# EAGLE board LowLevelv3 (EAGLE 9.2.2)
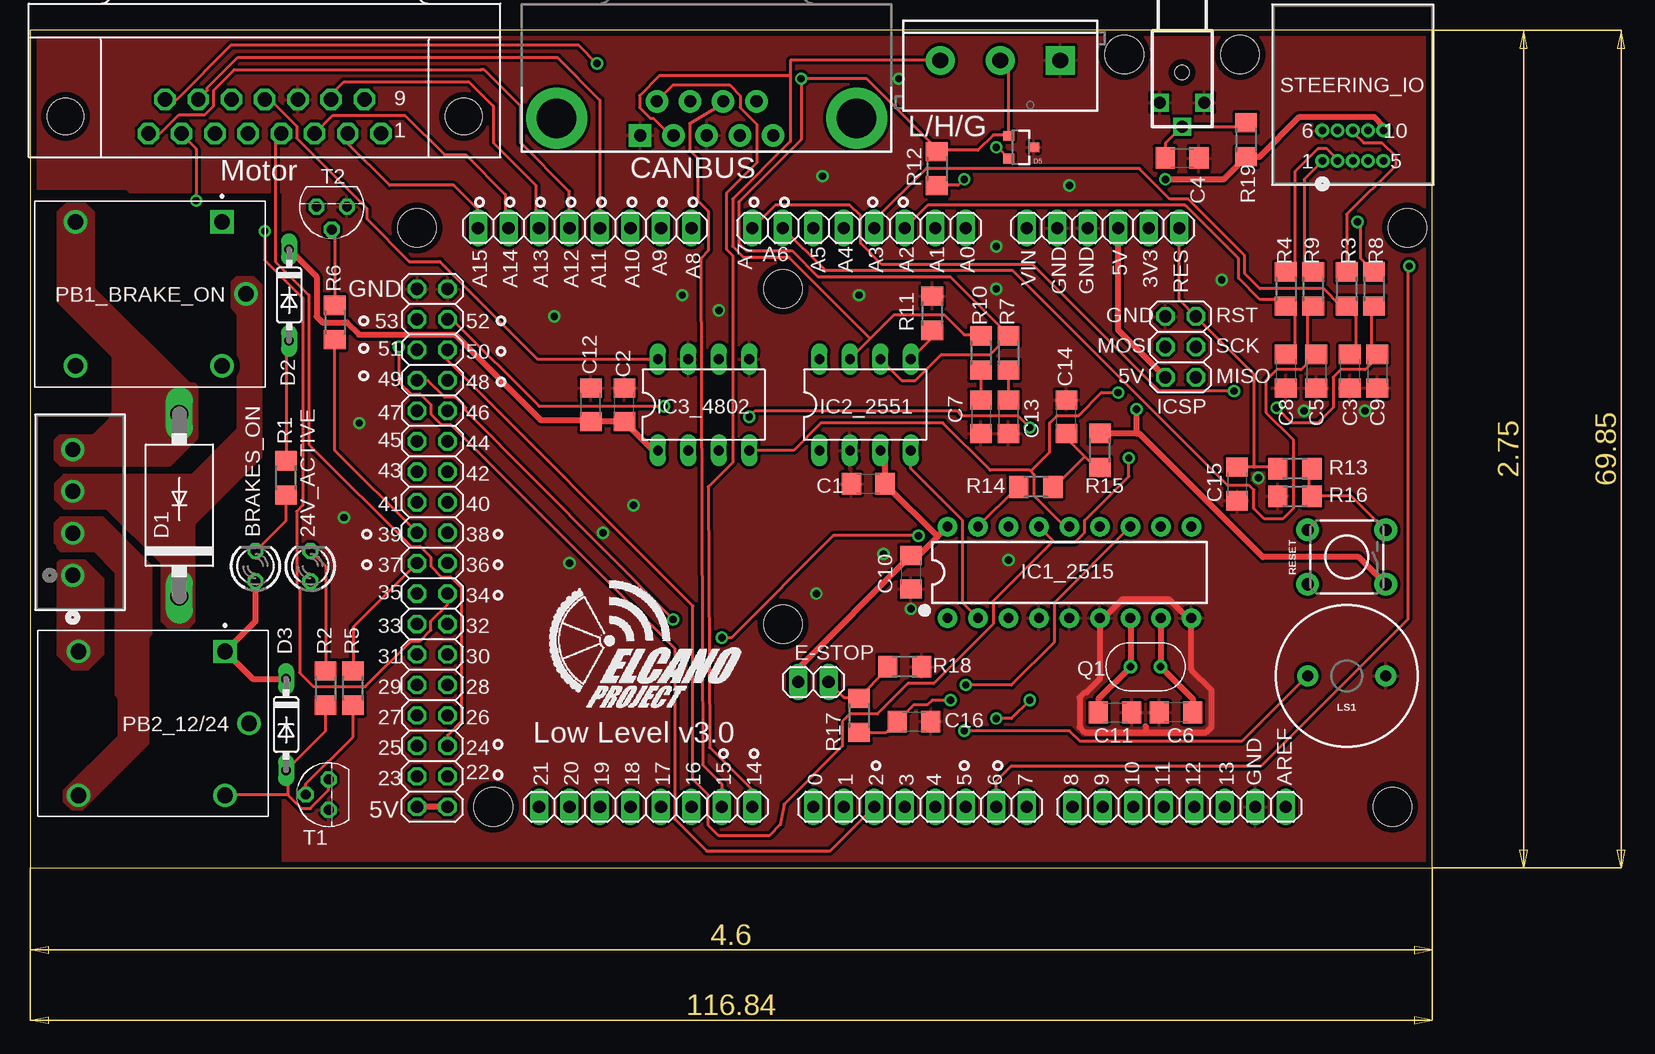
[diagram p0: board, top side]
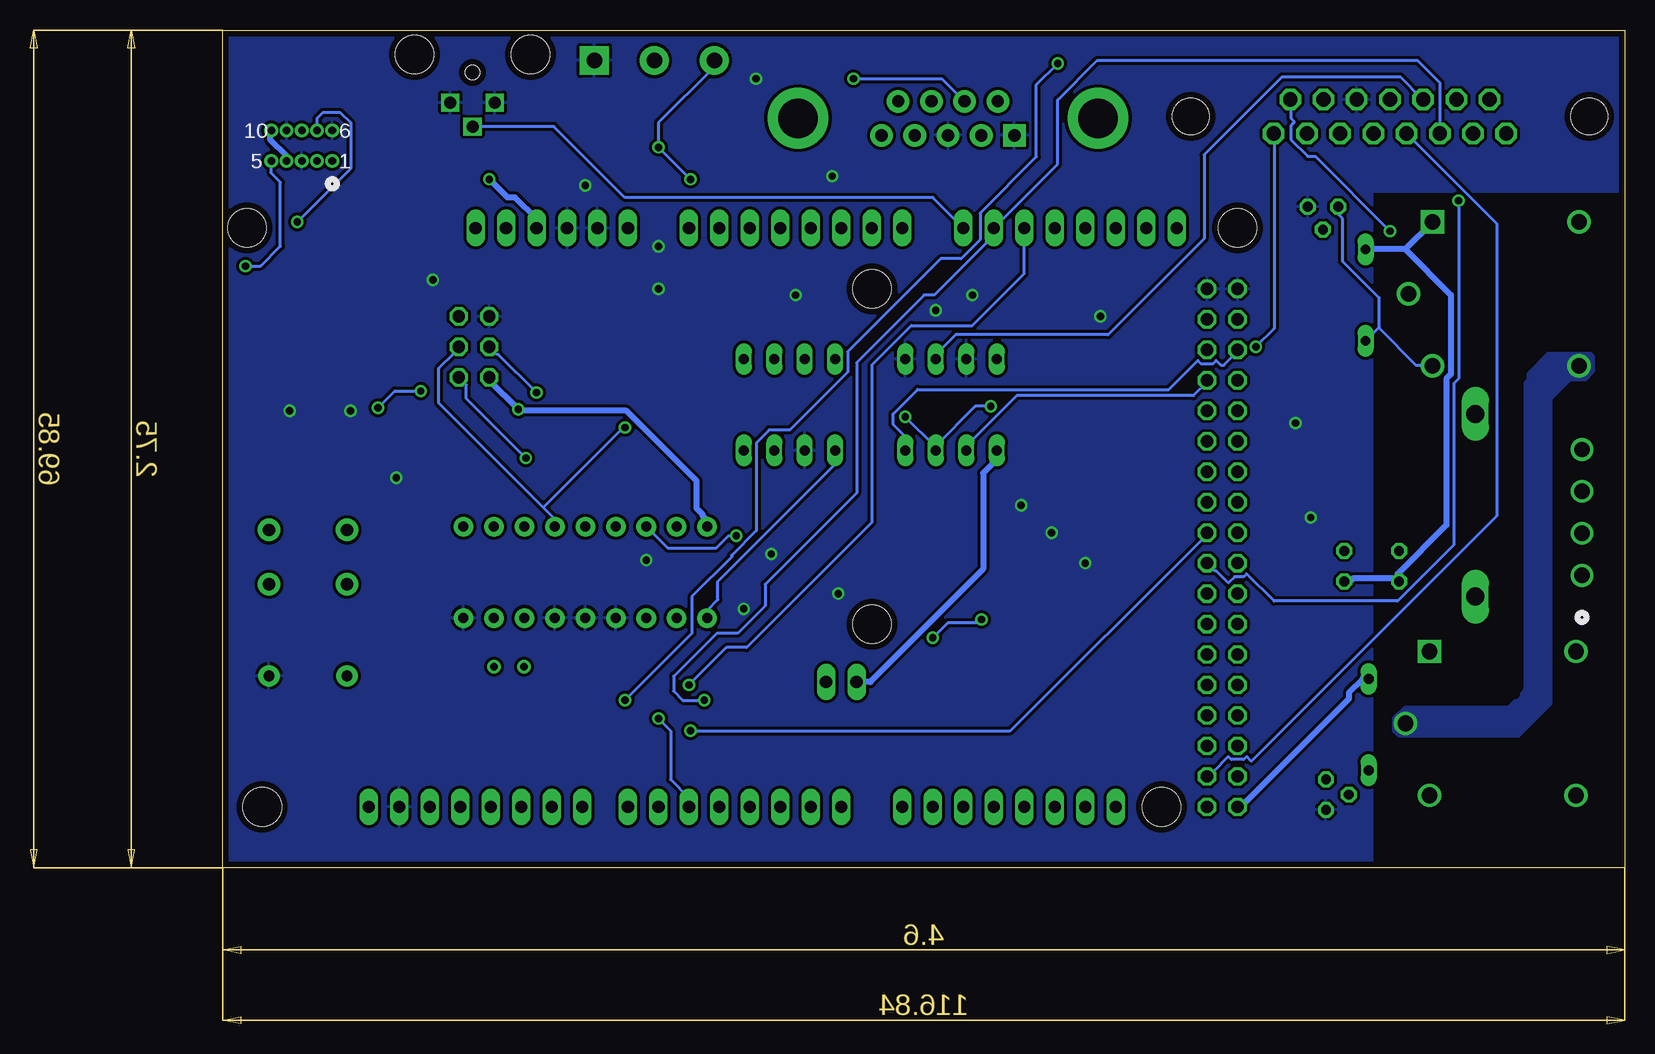
[diagram p1: board, bottom side, seen from below]

Size 116.84 x 69.85 mm. Coordinates in mm from the lower left corner, seen from the top.
Outline: 0,0 116.84,0 116.84,69.85 0,69.85 0,0
Copper layers (1*16): Top 0.035mm / dielectric 1.5mm / Bottom 0.035mm
Design rules "default *": minimum track width 10mil, minimum drill 24mil, track to track 8mil, track to pad 8mil, pad to pad 8mil, via to via 8mil, smd to smd 8mil, copper to edge 20mil, drill to drill 8mil, minimum pad ring 10mil, minimum via ring 8mil, stop-mask expansion 4mil, vias tented up to drill 0mil, thermal gap 10mil
Net classes: 0 default: width 0.254 mm, drill 0.305 mm, clearance 0.254 mm; 1 Power: width 0.508 mm, drill 0.305 mm, clearance 0.254 mm; 2 High Current: width 0.508 mm, drill 0.305 mm, clearance 0.508 mm; 3 SPI_Signals: width 0.254 mm, clearance 0.254 mm; 4 Oscillator: width 0.254 mm, clearance 0.508 mm
Holes 3.2 mm at 38.61,5.08 113.54,5.08 32.26,53.34 114.81,53.34 91.19,67.82 100.84,67.82 62.74,48.26 62.74,20.32
tRestrict: area 0,3.8 to 20.3,56.1
bRestrict: area 0,9.9 to 20.3,44.7

## Footprints (pad centres in the part's own frame; a part is rotated, then mirrored left to right if it is on the bottom)
LED3MM = drill 0.813 octagon: A -1.27,0; K 1.27,0
1X08 = drill 1.016 long: 1 -8.89,0; 2 -6.35,0; 3 -3.81,0; 4 -1.27,0; 5 1.27,0; 6 3.81,0; 7 6.35,0; 8 8.89,0
C1206 = smd 1.6 x 1.8: 1 -1.4,0; 2 1.4,0
SCREWTERMINAL-5MM-3 = drill 1.3 pad 2.413 square: 1 0,0 | drill 1.3 pad 2.413: 2 5,0; 3 10,0
DB9 = drill 1.016 pad 1.88 square: 1 -5.54,-1.42 | drill 1.016 pad 1.88: 2 -2.77,-1.42; 3 0,-1.42; 4 2.77,-1.42; 5 5.54,-1.42; 6 -4.15,1.42; 7 -1.38,1.42; 8 1.38,1.42; 9 4.15,1.42 | drill 3.302 pad 5.08: G1 -12.5,0; G2 12.5,0
DO201-15 = drill 1.499 long: A 7.62,0; C -7.62,0
DO35-7 = drill 0.813 long: A 3.81,0; C -3.81,0
SPARKFUN-DISCRETESEMI_SOT23-3 = smd 0.8 x 0.9: 1 -0.95,-1; 2 0.95,-1; 3 0,1.1
1X02 = drill 1.016 long: 1 -1.27,0; 2 1.27,0
DIP18 = drill 0.813 pad 1.626: 1 -10.16,-3.81; 2 -7.62,-3.81; 3 -5.08,-3.81; 4 -2.54,-3.81; 5 0,-3.81; 6 2.54,-3.81; 7 5.08,-3.81; 8 7.62,-3.81; 9 10.16,-3.81; 10 10.16,3.81; 11 7.62,3.81; 12 5.08,3.81; 13 2.54,3.81; 14 0,3.81; 15 -2.54,3.81; 16 -5.08,3.81; 17 -7.62,3.81; 18 -10.16,3.81
IC-PACKAGE_DIL08 = drill 0.813 long: 1 -3.81,-3.81; 2 -1.27,-3.81; 3 1.27,-3.81; 4 3.81,-3.81; 5 3.81,3.81; 6 1.27,3.81; 7 -1.27,3.81; 8 -3.81,3.81
DIL08 = drill 0.813 long: 1 -3.81,-3.81; 2 -1.27,-3.81; 3 1.27,-3.81; 4 3.81,-3.81; 5 3.81,3.81; 6 1.27,3.81; 7 -1.27,3.81; 8 -3.81,3.81
2X03 = drill 1.016 octagon: 1 -2.54,-1.27; 2 -2.54,1.27; 3 0,-1.27; 4 0,1.27; 5 2.54,-1.27; 6 2.54,1.27
BUZZER-12MM = drill 0.9 pad 1.778: + 3.25,0; - -3.25,0
PINHEAD_2X18 = drill 1.016 octagon: 1 -21.59,-1.27; 2 -21.59,1.27; 3 -19.05,-1.27; 4 -19.05,1.27; 5 -16.51,-1.27; 6 -16.51,1.27; 7 -13.97,-1.27; 8 -13.97,1.27; 9 -11.43,-1.27; 10 -11.43,1.27; 11 -8.89,-1.27; 12 -8.89,1.27; 13 -6.35,-1.27; 14 -6.35,1.27; 15 -3.81,-1.27; 16 -3.81,1.27; 17 -1.27,-1.27; 18 -1.27,1.27; 19 1.27,-1.27; 20 1.27,1.27; 21 3.81,-1.27; 22 3.81,1.27; 23 6.35,-1.27; 24 6.35,1.27; 25 8.89,-1.27; 26 8.89,1.27; 27 11.43,-1.27; 28 11.43,1.27; 29 13.97,-1.27; 30 13.97,1.27; 31 16.51,-1.27; 32 16.51,1.27; 33 19.05,-1.27; 34 19.05,1.27; 35 21.59,-1.27; 36 21.59,1.27
TE_ORWH-SH-105D1F,000 = drill 1.3 square: 1 0,0 | drill 1.3: 2 0,12; 3 -2,6; 4 12.2,0; 5 12.2,12
1X06 = drill 1.016 long: 1 -6.35,0; 2 -3.81,0; 3 -1.27,0; 4 1.27,0; 5 3.81,0; 6 6.35,0
XTAL_ECS-160-20-46X = drill 0.63 pad 1.03: 1 -1.25,0; 2 1.25,0
R1206 = smd 1.6 x 1.803: 1 -1.422,0; 2 1.422,0
TACTILE_SWITCH_PTH_6.0MM = drill 1.016 pad 1.88: 1 -3.251,2.261; 2 3.251,2.261; 3 -3.251,-2.261; 4 3.251,-2.261
CONN_5-104069-4_TYCO = drill 0.635 pad 1.143: 1 -5.08,-2.54; 2 -3.81,-2.54; 3 -2.54,-2.54; 4 -1.27,-2.54; 5 0,-2.54; 6 -5.08,0; 7 -3.81,0; 8 -2.54,0; 9 -1.27,0; 10 0,0
TO92 = drill 0.813 octagon: 1 1.27,0; 2 0,1.905; 3 -1.27,0
284512-4 = drill 1.27 pad 1.778: 1 0,0; 2 3.505,0; 3 7.01,0; 4 10.49,0
182-015-MALE = drill 1.194 pad 1.524 octagon: 1 -9.69,10.923; 2 -6.921,10.923; 3 -4.153,10.923; 4 -1.384,10.923; 5 1.384,10.923; 6 4.153,10.923; 7 6.921,10.923; 8 9.69,10.923; 9 -8.306,8.08; 10 -5.537,8.08; 11 -2.769,8.08; 12 0,8.08; 13 2.769,8.08; 14 5.537,8.08; 15 8.306,8.08 | hole 3.048: -16.599,9.501; 16.599,9.501
ODO_JACK = drill 1 square: P$1 4.5,0; P$2 2.5,1.85; P$3 2.5,-1.85 | hole 1.2: 0,0

## Placement (x,y rotation side)
24V_ACTIVE  [LED3MM]  23.37,25.15 90 top
ADCH  Analog In 8-15  [1X08]  46.23,53.34 0 top
ADCL  Analog In 0-7  [1X08]  69.09,53.34 0 top
BRAKES_ON  [LED3MM]  18.8,25.15 90 top
C1  0.1uF  [C1206]  69.85,32 180 top
C2  0.1uF  [C1206]  49.53,38.61 90 top
C3  1uF  [C1206]  109.98,41.4 270 top
C4  1 uF  [C1206]  96.01,59.18 0 top
C5  1uF  [C1206]  107.19,41.4 270 top
C6  33pF  [C1206]  95.5,12.95 180 top
C7  560pF  [C1206]  79.25,37.59 270 top
C8  1uF  [C1206]  104.65,41.4 270 top
C9  1uF  [C1206]  112.27,41.4 270 top
C10  0.1uF  [C1206]  73.41,24.64 270 top
C11  33pF  [C1206]  90.42,12.95 0 top
C12  0.1uF  [C1206]  46.74,38.61 90 top
C13  560pF  [C1206]  81.53,37.59 270 top
C14  0.1uF  [C1206]  86.36,37.59 90 top
C15  200nF  [C1206]  100.58,32 270 top
C16  200nF  [C1206]  73.66,12.19 0 top
CAN_HEADER  [SCREWTERMINAL-5MM-3]  85.85,67.31 180 top
CANBUS  DB9 Plug  [DB9]  56.39,62.48 0 top
D1  1N5400  [DO201-15]  12.45,30.23 90 top
D2  1N4148DO35-7  [DO35-7]  21.59,47.75 270 top
D3  1N4148DO35-7  [DO35-7]  21.34,11.94 270 top
D5  PESD1CAN  [SPARKFUN-DISCRETESEMI_SOT23-3]  82.55,60.07 270 top
DIGITAL_0-7  Digital 0-7  [1X08]  74.17,5.08 0 top
DIGITAL_8-13  Digital 8-13  [1X08]  95.76,5.08 0 top
DIGITAL_14-21  Digital 14-21  [1X08]  51.31,5.08 0 top
E-STOP  [1X02]  65.28,15.49 0 top
IC1_2515  MCP2515  [DIP18]  86.61,24.64 0 top
IC2_2551  MCP2551DIL08  [IC-PACKAGE_DIL08]  69.6,38.61 0 top
IC3_4802  MCP4802  [DIL08]  56.13,38.61 0 top
ICSP  ICSP  [2X03]  95.89,43.43 90 top
LS1  BUZZER-PTH  [BUZZER-12MM]  109.73,16 180 top
MEGA_EXPANSION  Digital 22-53  [PINHEAD_2X18]  33.53,26.67 270 top
PB1_BRAKE_ON  ORWH-SH-105D1F,000  [TE_ORWH-SH-105D1F,000]  16,53.85 180 top
PB2_12/24  ORWH-SH-105D1F,000  [TE_ORWH-SH-105D1F,000]  16.26,18.03 180 top
POWER  [1X06]  89.41,53.34 180 top
Q1  16MHz  [XTAL_ECS-160-20-46X]  92.96,16.76 0 top
R1  1K  [R1206]  21.34,32.51 270 top
R2  1K  [R1206]  24.64,14.99 90 top
R3  4.7K  [R1206]  109.73,48.26 90 top
R4  4.7K  [R1206]  104.65,48.26 90 top
R5  1K  [R1206]  26.92,14.99 270 top
R6  1K  [R1206]  25.4,45.47 90 top
R7  100  [R1206]  81.53,42.93 90 top
R8  4.7K  [R1206]  112.01,48.26 90 top
R9  4.7K  [R1206]  106.93,48.26 90 top
R10  100  [R1206]  79.25,42.93 90 top
R11  4.7K  [R1206]  75.18,46.23 90 top
R12  120  [R1206]  75.56,58.29 90 top
R13  10k  [R1206]  105.41,33.27 0 top
R14  1K  [R1206]  83.82,31.75 0 top
R15  20K  [R1206]  89.15,34.8 270 top
R16  10k  [R1206]  105.41,30.99 180 top
R17  10k  [R1206]  69.09,12.7 90 top
R18  10k  [R1206]  72.9,16.76 0 top
R19  4.7K  [R1206]  101.35,60.71 90 top
RESET  MOMENTARY-SWITCH-SPST-PTH-6.0MM  [TACTILE_SWITCH_PTH_6.0MM]  109.73,25.91 180 top
STEERING_IO  5-104069-4  [CONN_5-104069-4_TYCO]  112.78,61.47 0 top
T1  2N3904  [TO92]  24.89,6.1 90 top
T2  2N3904  [TO92]  25.15,55.12 180 top
X1  284512-4  [284512-4]  3.56,24.38 90 top
X3  Motor  [182-015-MALE]  19.56,72.14 180 top
X4  CLICK  [ODO_JACK]  96.01,66.29 270 top

## Library data of the parts
24V_ACTIVE BRAKES_ON = led
ADCH ADCL DIGITAL_0-7 DIGITAL_8-13 DIGITAL_14-21 E-STOP ICSP POWER = pinhead
C1-C16 R1-R19 = resistor
CAN_HEADER = SparkFun-Connectors; PROD_ID: CONN-10134; SF_SKU: PRT-08433
CANBUS = SparkFun-Connectors; PROD_ID: CONN-08194; SPICEPREFIX: X
D1-D3 = diode
D5 = elcanoParts; SPICEPREFIX: J
IC1_2515 = SparkFun-IC-Comms; PROD_ID: NA-XXXXX; SPICEPREFIX: X
IC2_2551 = elcanoParts; SPICEPREFIX: X
IC3_4802 = ic-package
LS1 = SparkFun-Electromechanical; PROD_ID: COMP-08253; SF_SKU: COM-07950
MEGA_EXPANSION X4 = elcanoParts
PB1_BRAKE_ON PB2_12/24 = elcanoParts; DESCRIPTION: General Purpose Relay, ORWH Series, Power, Non Latching, SPDT, 5 VDC, 10 A; DIGI-KEY_PART_NUMBER: PB2032-ND; DIGI-KEY_PURCHASE_URL: https://www.digikey.com/product-detail/en/te-connectivity-potter-brumfield-relays/ORWH-SH-105D1F,000/PB2032-ND/4925028?utm_source=snapeda&utm_medium=aggregator&utm_campaign=symbol; MF: TE; MP: ORWH-SH-105D1F,000; PACKAGE: None
Q1 = elcanoParts; DESCRIPTION: Crystal 16MHz ±30ppm _Tol_ ±50ppm _Stability_ 20pF FUND 50Ohm; DIGI-KEY_PART_NUMBER: XC1759-ND; DIGI-KEY_PURCHASE_URL: https://www.digikey.com/product-detail/en/ecs-inc/ECS-160-20-46X/XC1759-ND/2676589?utm_source=snapeda&utm_medium=aggregator&utm_campaign=symbol; MF: ECS Inc.; MP: ECS-160-20-46X; PACKAGE: HC46/X ECS International; SPICEPREFIX: B
RESET = SparkFun-Switches; PROD_ID: SWCH-08441; SF_SKU: COM-00097
STEERING_IO = elcanoParts; MANUFACTURER_PART_NUMBER: 51040694; VENDOR: TE Connectivity
T1 T2 = transistor
X1 = elcanoParts; MANUFACTURER_PART_NUMBER: 2845124; VENDOR: TE Connectivity
X3 = con-subd; OC_FARNELL: unknown; OC_NEWARK: unknown

## Nets
3.3V [Power]: POWER.2
5V [Power]: 24V_ACTIVE.A BRAKES_ON.A C1.1 C2.1 C10.1 C12.1 D2.C D3.C E-STOP.1 IC1_2515.18 IC2_2551.3 IC3_4802.1 ICSP.2 MEGA_EXPANSION.35 MEGA_EXPANSION.36 PB1_BRAKE_ON.1 PB2_12/24.1 POWER.3 R15.1 R19.1 RESET.1 STEERING_IO.4 STEERING_IO.10
12V [High Current]: PB2_12/24.4 X1.1
24V [High Current]: PB2_12/24.5 X1.2
BRAKE_ON: MEGA_EXPANSION.17 R6.1
BRAKE_PWM: DIGITAL_0-7.3 X3.1
BUZZER: LS1.+ MEGA_EXPANSION.18
CAN_INT: ADCH.6 IC1_2515.12
CAN_RXD: IC1_2515.2 IC2_2551.4
CAN_SS [SPI_Signals]: IC1_2515.16 MEGA_EXPANSION.7
CAN_TXD: IC1_2515.1 IC2_2551.1
CANH: CAN_HEADER.2 CANBUS.7 D5.1 IC2_2551.6 R7.2 R12.2
CANL: CAN_HEADER.3 CANBUS.2 D5.2 IC2_2551.7 R10.2 R12.1
D_36: MEGA_EXPANSION.20 X3.7
DAC_SS [SPI_Signals]: IC3_4802.2 MEGA_EXPANSION.8
DACA: IC3_4802.8 X3.12
DACB: IC3_4802.6 X3.13
EBIKECONTRL: ADCH.3 X3.10
ESTOP_INT: ADCH.7 C16.1 R17.1 X3.6
FWDSW: MEGA_EXPANSION.22 X3.9
GND [Power]: C1.2 C2.2 C3.2 C4.2 C5.2 C6.2 C7.2 C8.2 C9.2 C10.2 C11.2 C12.2 C13.2 C14.2 C15.2 C16.2 CAN_HEADER.1 CANBUS.1 CANBUS.3 D5.3 DIGITAL_8-13.7 IC1_2515.4 IC1_2515.5 IC1_2515.6 IC1_2515.9 IC2_2551.2 IC3_4802.5 IC3_4802.7 ICSP.6 LS1.- MEGA_EXPANSION.1 MEGA_EXPANSION.2 POWER.4 POWER.5 R11.2 R16.2 R18.2 STEERING_IO.3 STEERING_IO.6 STEERING_IO.9 T1.3 T2.3 X3.11 X4.P$2 X4.P$3
HALLPHASEA: ADCH.1 X3.2
HALLPHASEB: ADCH.2 X3.3
HALLPHASEC: ADCH.4 X3.8
L_RET: R9.2 STEERING_IO.1
L_RTN_GND: ADCL.2 C5.1 R9.1
L_SENSE: ADCL.6 C8.1 R4.1
L_STR: R4.2 STEERING_IO.2
MISO [SPI_Signals]: IC1_2515.15 ICSP.1 MEGA_EXPANSION.6
MOSI [SPI_Signals]: IC1_2515.14 IC3_4802.4 ICSP.4 MEGA_EXPANSION.5
N$1: R13.2 R16.1 RESET.3
N$2: R5.2 T1.2
N$3: D3.A PB2_12/24.2 R2.1 T1.1
N$4: C14.1 R14.2 R15.2
N$6: 24V_ACTIVE.K R2.2
N$7: R6.2 T2.2
N$8: E-STOP.2 R17.2 R18.1
N$9: C7.1 R10.1
N$10: C13.1 R7.1
N$12: D2.A PB1_BRAKE_ON.2 R1.1 T2.1
N$13: BRAKES_ON.K R1.2
N$14: IC2_2551.5 R11.1
OSC1 [Oscillator]: C6.1 IC1_2515.8 Q1.2
OSC2 [Oscillator]: C11.1 IC1_2515.7 Q1.1
R_RET: R8.2 STEERING_IO.7
R_RTN_GND: ADCL.1 C9.1 R8.1
R_SENSE: ADCL.5 C3.1 R3.1
R_STR: R3.2 STEERING_IO.8
REGEN_ACTIVE: MEGA_EXPANSION.34 X3.5
RESET: C15.1 ICSP.5 POWER.1 R13.1
REVERSE: MEGA_EXPANSION.32 X3.4
RS: IC1_2515.17 R14.1
RX0: DIGITAL_0-7.1
RX3: CANBUS.8 DIGITAL_14-21.7
SCK [SPI_Signals]: IC1_2515.13 IC3_4802.3 ICSP.3 MEGA_EXPANSION.4
SOLENOID_COMMON [High Current]: D1.A PB1_BRAKE_ON.4 X1.4
SOLENOID_OUT [High Current]: D1.C PB1_BRAKE_ON.3 X1.3
SOLENOID_POWER [High Current]: PB1_BRAKE_ON.5 PB2_12/24.3
SPEEDOMETER: ADCH.5 X3.14
SPI_SLAVE [SPI_Signals]: MEGA_EXPANSION.3
STEER_SERVO_PWM: DIGITAL_0-7.7 STEERING_IO.5
TX0: DIGITAL_0-7.2
TX3: CANBUS.6 DIGITAL_14-21.8
VIN: POWER.6
VOLTAGE_SWITCH: MEGA_EXPANSION.19 R5.1
WATCHDOG: DIGITAL_0-7.6 X3.15
WHEELROTATION: ADCH.8 C4.1 R19.2 X4.P$1

## Tracks (layer width: path | path; a pad name or v marks a point on that pad's centre or on a via)
5V  (via drill 0.61)
  Top 0.508: 92.2,36.2 92.46,36.2 102.74,25.91 110.74,25.91 112.9,23.75 RESET.1 | 92.2,36.2 89.15,36.2 R15.1 | POWER.3 90.68,44.83 ICSP.2 | STEERING_IO.10 112.78,61.85 112.01,62.61 105.79,62.61 102.46,59.28 R19.1 99.47,57.4 v94.61,57.4 | v92.2,38.23 92.2,36.2 | MEGA_EXPANSION.36 MEGA_EXPANSION.35 | D3.C 18.54,15.75 PB2_12/24.1 18.8,20.57 BRAKES_ON.A | IC2_2551.3 71.25,34.42 C1.1 71.37,31.88 75.63,27.62 | IC1_2515.18 75.63,27.62 | 75.63,27.62 74.17,26.16 73.41,26.16 C10.1 73.28,25.91 64.01,16.64 E-STOP.1 | IC3_4802.1 51.94,34.8 49.66,37.08 C2.1 C12.1 46.61,37.34 42.55,37.34 35.43,44.45 27.43,44.45 26.42,45.47 24.38,45.47 23.88,45.97 23.88,49.28 D2.C
  Bottom 0.508: STEERING_IO.4 111.51,59.31 112.9,60.71 112.9,61.34 STEERING_IO.10 | v94.61,57.4 93.09,55.88 92.46,55.88 90.68,54.1 POWER.3 | ICSP.2 94.61,40.64 v92.2,38.23 92.08,38.1 83.19,38.1 77.34,32.26 77.34,29.97 76.83,29.46 76.83,29.34 76.45,28.96 IC1_2515.18 | 24V_ACTIVE.A 22.86,23.88 22.61,24.13 19.05,24.13 BRAKES_ON.A 18.92,24.26 18.92,24.51 14.86,28.57 14.86,40.77 14.48,41.15 14.48,47.75 18.29,51.56 | MEGA_EXPANSION.35 32,5.08 22.99,14.1 22.99,14.61 21.84,15.75 D3.C | 18.29,51.56 D2.C | PB1_BRAKE_ON.1 18.29,51.56 | E-STOP.1 62.87,15.49 53.47,24.89 53.47,32.89 52.32,34.04 IC3_4802.1
12V
  pour Top (isolate 0.305, no thermals): 2.54,25.65 4.57,25.65 6.1,24.13 6.1,17.78 4.57,16.26 3.56,16.26 2.03,17.78 2.03,25.15
24V
  pour Top (isolate 0.305, no thermals): 6.1,29.21 2.54,29.21 1.78,28.45 1.78,27.18 2.54,26.42 5.33,26.42 7.11,24.64 7.11,10.92 2.54,6.35 2.54,5.59 3.56,4.57 4.57,4.57 10.16,10.16 10.16,25.15
BRAKE_ON
  Top 0.254: R6.1 25.4,34.8 MEGA_EXPANSION.17
BRAKE_PWM  (via drill 0.61)
  Top 0.254: DIGITAL_0-7.3 66.67,1.4 56.39,1.4 53.72,4.06 53.72,18.29 35.05,36.96 34.29,36.96 33.4,37.85 33.4,38.61 32.51,39.5 31.75,39.5 30.73,40.51 v30.73,43.43
  Bottom 0.254: v30.73,43.43 29.21,44.96 29.21,61.09 X3.1
BUZZER  (via drill 0.61)
  Top 0.254: v77.85,11.43 86.61,11.43 87.5,10.54 100.97,10.54 106.43,16 LS1.+
  Bottom 0.254: MEGA_EXPANSION.18 35.18,27.56 35.18,27.43 51.18,11.43 v77.85,11.43
CAN_INT  (via drill 0.61)
  Top 0.254: IC1_2515.12 85.34,22.1 85.34,18.8 81.79,15.24 v77.98,15.24
  Bottom 0.254: v77.98,15.24 74.85,18.36 73.17,18.36 62.74,28.79 62.74,41.91 59.44,45.21 54.36,45.21 50.04,49.53 ADCH.6
CAN_RXD
  Top 0.254: IC2_2551.4 73.41,33.27 77.72,28.96 77.72,22.1 IC1_2515.2
CAN_SS  (via drill 0.61)
  Top 0.254: MEGA_EXPANSION.7 33.15,40.64 34.54,39.24 35.43,39.24 36.32,38.35 36.32,38.1 v53.59,20.7 | v57.66,19.18 58.42,19.18 66.93,27.69 v74.04,27.69
  Bottom 0.254: v53.59,20.7 53.85,20.45 56.39,20.45 v57.66,19.18 | v74.04,27.69 74.68,27.69 75.69,26.67 79.76,26.67 IC1_2515.16
CAN_TXD
  Bottom 0.254: IC2_2551.1 65.79,33.66 75.56,23.88 75.56,22.35 76.45,21.46 IC1_2515.1
CANH  (via drill 0.61)
  Top 0.254: IC2_2551.6 72.64,40.64 73.79,40.64 75.95,42.8 80.01,42.8 81.53,44.32 R7.2 81.53,44.45 76.71,49.28 65.66,49.28 63.5,51.44 59.69,51.44 59.05,52.07 59.05,55.5 64.26,60.71 v64.26,65.79 69.72,65.79 75.69,59.82 | CAN_HEADER.2 80.9,67.31 81.53,66.67 81.53,61.09 D5.1 81.41,61.09 80.26,61.09 78.99,59.82 75.69,59.82 | 75.69,59.82 75.56,59.82 R12.2 75.69,59.82
  Bottom 0.254: v64.26,65.79 56.9,65.79 55.12,64.01 CANBUS.7
CANL  (via drill 0.61)
  Top 0.254: IC2_2551.7 70.04,44.13 | 70.04,44.13 72.01,46.1 76.2,46.1 77.85,44.45 79.25,44.45 R10.2 | v80.52,60.07 80.64,60.07 81.53,59.18 D5.2 | v77.85,57.4 77.34,56.9 75.56,56.9 R12.1 | CAN_HEADER.3 63.37,67.31 63.37,66.04 | 63.37,66.04 52.45,66.04 50.8,64.39 50.8,63.37 51.69,62.48 51.94,62.48 53.34,61.09 53.59,61.09 CANBUS.2 | 70.04,44.13 63.25,50.93 59.44,50.93 58.55,51.82 58.55,55.75 63.37,60.58 63.37,66.04
  Bottom 0.254: CAN_HEADER.3 75.95,67.31 75.95,66.67 80.52,62.1 v80.52,60.07 v77.85,57.4
D_36  (via drill 0.61)
  Top 0.254: v13.84,55.63 13.84,59.94 12.7,61.09 X3.7
  Bottom 0.254: MEGA_EXPANSION.20 34.16,24.77 34.04,24.77 33.02,23.75 32.51,24.26 31.75,24.26 31.5,24.51 29.21,22.23 18.92,22.23 14.22,26.92 14.22,40.39 13.84,40.77 v13.84,55.63
DAC_SS
  Bottom 0.254: IC3_4802.2 54.86,35.18 50.67,39.37 35.94,39.37 34.8,40.51 MEGA_EXPANSION.8
DACA
  Top 0.254: IC3_4802.8 42.29,42.42 34.16,50.55 31.62,50.55 28.07,54.1 28.07,54.99 22.23,60.83 22.23,61.85 20.07,64.01 19.56,64.01 X3.12
DACB
  Bottom 0.254: IC3_4802.6 57.4,42.8 55.75,44.45 43.05,44.45 35.05,52.45 35.05,59.44 28.57,65.91 18.67,65.91 16.89,64.14 X3.13
EBIKECONTRL
  Top 0.254: X3.10 25.09,64.47 26.16,65.53 36.58,65.53 38.61,63.5 38.61,60.45 42.16,56.9 42.16,53.59 ADCH.3
ESTOP_INT  (via drill 0.61)
  Top 0.254: R17.1 71.35,11.28 C16.1 73.66,13.59 74.79,13.59 75.17,13.97 v76.71,13.97
  Bottom 0.254: X3.6 15.4,65.44 17.27,67.31 43.94,67.31 47.24,64.01 47.24,58.67 ADCH.7 53.21,52.7 53.21,52.07 57.53,47.75 58.38,47.75 64.01,42.12 64.01,31.24 71.63,23.62 71.63,21.84 73.91,19.56 75.65,19.56 79.25,15.96 79.25,14.73 78.49,13.97 v76.71,13.97
FWDSW  (via drill 0.61)
  Top 0.254: MEGA_EXPANSION.22 34.8,21.97 33.4,20.57 33.4,19.81 32.51,18.92 31.75,18.92 27.94,15.11 23.62,15.11 22.48,16.26 22.48,23.24 22.23,23.5 22.23,29.72 22.73,30.23 22.73,47.5 19.56,50.67 v19.56,53.09
  Bottom 0.254: v19.56,53.09 25.78,59.31 26.42,59.31 27.81,60.71 27.81,61.85 27.56,62.1 27.56,62.23 27.81,62.48 27.81,64.01 X3.9
GND  (via drill 0.61)
  Top 0.508: 92.96,11.29 87.91,11.29 87.46,11.74 87.46,14.17 87.91,14.62 88.02,14.62 89.15,15.75 IC1_2515.6 89.47,20.83 91.04,22.4 94.89,22.4 96.46,20.83 IC1_2515.9 96.77,16.51 98.47,14.82 98.47,11.74 98.02,11.29 92.96,11.29 | 92.96,11.81 92.96,11.29
  other vias: 102.36,32.51 106.17,38.1 111.25,38.1 69.09,47.75 80.52,48.26 80.52,51.82 73.41,21.59 26.16,29.21 27.43,37.08 50.29,30.23 44.96,25.4 43.69,45.97 66.04,57.66 47.75,27.94 86.61,56.9 99.31,49.02 72.39,65.79 71.12,26.16 65.53,22.86 54.36,47.75 57.4,46.48 81.53,25.65
  pour Bottom (isolate 0.254): 0,56.39 21.08,56.39 21.08,0 116.84,0 116.84,69.85 0,69.85
  pour Top (isolate 0.254): 0,56.39 21.08,56.39 21.08,0 116.84,0 116.84,69.85 0,69.85
HALLPHASEA
  Top 0.254: ADCH.1 37.34,54.86 35.31,56.9 29.97,56.9 26.48,60.39 X3.2
HALLPHASEB
  Top 0.254: X3.3 25.24,62.74 31.24,62.74 34.54,59.44 36.32,59.44 39.62,56.13 39.62,53.59 ADCH.2
HALLPHASEC
  Top 0.254: X3.8 10.83,61.21 12.4,62.78 14.55,62.78 15.3,63.53 15.3,64.83 17.02,66.55 37.59,66.55 37.85,66.55 40.89,63.5 40.89,60.45 44.96,56.39 ADCH.4
L_RET
  Top 0.254: R9.2 106.17,50.44 106.17,57.4 STEERING_IO.1
L_RTN_GND
  Top 0.254: R9.1 106.43,46.33 106.43,43.56 C5.1 105.92,41.53 103.89,41.53 103,40.64 103,37.97 105.28,35.69 105.28,29.97 104.39,29.08 102.87,29.08 101.98,29.97 101.98,31.5 101.6,31.88 99.82,31.88 81.92,49.78 66.29,49.78 ADCL.2
L_SENSE
  Top 0.254: C8.1 105.41,43.56 105.41,46.1 104.67,46.84 R4.1 104.65,47.37 102.49,47.37 100.71,49.15 100.71,50.8 96.27,55.24 74.8,55.24 ADCL.6
L_STR
  Top 0.254: R4.2 105.41,50.44 105.41,58.04 107.31,59.94 108.08,59.94 108.97,59.05 STEERING_IO.2
MISO  (via drill 0.61)
  Top 0.254: v91.57,34.16 91.57,32.64 87.88,28.96 87.88,27.94 87.12,27.18 85.34,27.18 85.28,27.24 | IC1_2515.15 85.28,27.24 | MEGA_EXPANSION.6 34.8,42.29 55.24,21.84 55.24,7.37 56.52,6.1 56.52,3.56 57.4,2.67 61.59,2.67 62.54,3.61 62.84,5.31 67.69,10.16 67.69,12.19 68.33,12.83 70.61,12.83 73.15,15.37 75.31,15.37 80.26,20.32 80.26,22.23 85.28,27.24
  Bottom 0.254: ICSP.1 96.52,40.26 96.52,39.12 v91.57,34.16
MOSI  (via drill 0.61)
  Top 0.254: IC3_4802.4 63.63,34.8 65.91,37.08 76.07,37.08 80.01,33.15 83.31,33.15 83.38,33.08 | 83.38,33.08 83.69,32.77 83.69,30.99 86.23,28.45 IC1_2515.14 | v90.68,39.62 89.28,39.62 87.38,37.72 85.6,37.72 84.96,37.08 84.96,34.67 83.38,33.08
  Bottom 0.254: MEGA_EXPANSION.5 32.64,42.8 32.64,42.67 33.4,41.91 33.66,41.91 34.04,42.29 34.29,42.04 35.31,42.04 35.56,42.29 37.97,39.88 58.93,39.88 60.96,37.85 60.96,36.96 59.94,35.94 IC3_4802.4 | ICSP.4 93.98,42.8 93.85,42.8 v90.68,39.62
N$1
  Top 0.254: R13.2 106.55,33.27 106.55,30.99 R16.1 110.11,30.99 112.9,28.19 RESET.3
N$2
  Top 0.254: R5.2 26.92,10.92 22.99,6.99 T1.2
N$3
  Top 0.254: R2.1 24.64,11.43 D3.A 21.46,8.13 21.46,6.1 | T1.1 24.89,6.48 23.37,4.95 22.61,4.95 21.46,6.1 | 21.46,6.1 16.26,6.1 PB2_12/24.2
N$4
  Top 0.254: 87.88,34.29 89.15,33.02 R15.2 | 87.88,34.29 86.36,35.81 C14.1 | 87.88,34.29 85.34,31.75 R14.2
N$6
  Top 0.254: R2.2 24.64,25.15 24V_ACTIVE.K
N$7
  Top 0.254: R6.2 25.4,52.96 T2.2
N$8
  Top 0.254: 69.09,14.22 67.82,14.22 E-STOP.2 | 69.09,14.22 71.37,16.51 71.37,16.76 R18.1 | 69.09,14.22 R17.2
N$9
  Top 0.254: R10.1 C7.1
N$10
  Top 0.254: R7.1 C13.1
N$12
  Top 0.254: R1.1 21.34,43.69 D2.A
  Bottom 0.254: T2.1 23.88,54.48 23.5,54.1 23.5,50.55 20.45,47.5 20.45,45.09 20.51,45.02 | D2.A 20.51,45.02 | 20.51,45.02 17.4,41.91 16,41.91 PB1_BRAKE_ON.2
N$13
  Top 0.254: R1.2 21.34,28.96 BRAKES_ON.K
N$14
  Top 0.254: R11.1 75.18,44.2 IC2_2551.5
OSC1
  Top 0.508: IC1_2515.8 94.23,16.78 Q1.2 96.9,14.07 C6.1
OSC2
  Top 0.508: IC1_2515.7 91.71,20.81 Q1.1 89.02,14.07 C11.1
R_RET  (via drill 0.61)
  Top 0.254: R8.2 110.87,50.83 110.87,53.59 v110.62,53.85
  Bottom 0.254: v110.62,53.85 106.17,58.29 106.17,62.1 107.06,62.99 108.46,62.99 108.97,62.48 STEERING_IO.7
R_RTN_GND  (via drill 0.61)
  Top 0.254: R8.1 111.76,46.58 111.76,43.31 C9.1 112.27,42.55 111.25,41.53 109.22,41.53 108.58,40.89 108.58,38.35 107.31,37.08 105.16,37.08 v103.89,38.35 | ADCL.1 62.1,55.24 68.33,55.24 69.22,54.36 69.22,52.07 70.99,50.29 83.57,50.29 94.11,39.75 v100.33,39.75
  Bottom 0.254: v100.33,39.75 102.49,39.75 v103.89,38.35
R_SENSE
  Top 0.254: C3.1 110.49,43.31 110.49,45.97 109.73,46.74 R3.1 109.25,46.84 107.8,48.28 102.49,48.28 101.22,49.55 101.22,51.05 96.52,55.75 95,55.75 92.46,58.29 74.68,58.29 70.36,53.98 ADCL.5
R_STR
  Top 0.254: R3.2 109.73,54.48 113.79,58.55 113.79,59.31 112.65,60.45 111.12,60.45 110.24,61.34 STEERING_IO.8
REGEN_ACTIVE
  Bottom 0.254: MEGA_EXPANSION.34 34.42,8 34.29,8 33.02,9.27 32.77,9.02 31.75,9.02 31.5,9.27 31.11,8.89 10.67,29.34 10.67,53.72 X3.5
RESET
  Top 0.254: 101.98,33.4 103.5,33.4 103.63,33.27 R13.1 | 101.98,33.4 C15.1 | 101.98,33.4 101.98,41.15 ICSP.5 95.76,47.37 POWER.1
REVERSE
  Top 0.254: MEGA_EXPANSION.32 34.8,11.05 35.94,12.19 35.94,23.37 35.05,24.26 34.29,24.26 33.4,25.15 33.4,25.91 32.51,26.8 31.75,26.8 23.24,35.31 23.24,47.75 20.45,50.55 20.45,60.71 20.83,61.09 X3.4
RS
  Top 0.254: IC1_2515.17 82.3,31.75 R14.1
RX3
  Top 0.254: DIGITAL_14-21.7 57.66,6.99 56.05,8.6 55.88,50.8 56.52,51.44 56.52,54.74 55.63,55.63 55.63,59.18 54.97,59.84 54.97,62.05 57.06,63.28 57.68,63.9 CANBUS.8
SCK  (via drill 0.61)
  Top 0.254: v52.83,38.48 42.42,38.48 35.18,45.72 MEGA_EXPANSION.4 | v83.31,36.7 82.3,37.72 77.6,37.72 77.22,38.1 60.45,38.1 v59.94,37.59
  Bottom 0.254: ICSP.3 97.54,43.05 97.54,42.93 98.81,41.66 98.81,38.73 90.11,30.04 | 90.11,30.04 89.15,29.08 IC1_2515.13 | 57.4,35.18 IC3_4802.3 | 57.4,35.18 54.1,38.48 v52.83,38.48 | 57.4,35.18 57.47,35.12 v59.94,37.59 | 90.11,30.04 83.44,36.7 v83.31,36.7
SOLENOID_COMMON
  pour Top (isolate 0.305, no thermals): 2.54,33.53 11.68,33.53 13.97,35.81 13.97,40.13 5.59,48.51 5.59,54.86 4.83,55.63 2.79,55.63 2.03,54.86 2.03,47.24 6.6,42.67 6.6,37.59 5.33,36.32 2.54,36.32 1.78,35.56 1.78,34.29
SOLENOID_OUT
  pour Top (isolate 0.305, no thermals): 2.79,29.97 6.35,29.97 10.92,25.4 10.92,20.57 11.68,19.81 13.21,19.81 13.97,20.57 13.97,28.45 19.56,34.04 19.56,48.77 18.8,49.53 17.27,49.53 16.51,48.77 16.51,46.74 17.27,45.97 17.27,36.58 13.46,32.77 2.79,32.77 2.03,32 2.03,30.73
SOLENOID_POWER
  pour Bottom (isolate 0.305, no thermals): 18.8,13.46 19.56,12.7 19.56,11.43 18.8,10.67 8.64,10.67 5.84,13.46 5.84,39.12 4.57,40.39 3.05,40.39 2.54,40.89 2.54,42.67 3.05,43.18 6.35,43.18 8.38,41.15 8.38,14.99 9.91,13.46
SPEEDOMETER
  Top 0.254: X3.14 14.79,64.83 14.79,65.04 17.32,67.56 43.94,67.56 47.5,64.01 47.5,56.64 47.5,56.39 ADCH.5
STEER_SERVO_PWM  (via drill 0.61)
  Top 0.254: v114.94,50.16 114.81,50.04 114.81,20.7 102.62,8.51 81.79,8.51 80.52,7.24 DIGITAL_0-7.7
  Bottom 0.254: STEERING_IO.5 112.78,57.91 112.01,57.15 112.01,51.82 113.67,50.16 v114.94,50.16
TX3
  Top 0.254: DIGITAL_14-21.8 60.2,6.48 56.64,10.03 56.52,31.75 58.55,33.78 58.55,51.05 58.04,51.56 58.04,56.26 60.58,58.8 60.58,61.98 59.18,63.37 59.18,64.39 58.29,65.28 53.59,65.28 52.32,64.01 CANBUS.6
VOLTAGE_SWITCH
  Top 0.254: R5.1 26.92,20.07 MEGA_EXPANSION.19
WATCHDOG  (via drill 0.61)
  Top 0.254: X3.15 12.22,64.06 16.74,68.58 45.72,68.58 v47.24,67.06 | v83.31,13.97 81.79,12.45 v80.52,12.45
  Bottom 0.254: v83.31,13.97 77.72,19.56 77.72,22.61 74.42,25.91 74.42,26.05 72.36,28.11 72.36,35.43 71.3,36.5 69.57,36.5 64.75,41.33 64.75,43.03 56.99,50.78 55.3,50.78 53.72,52.36 53.72,54.58 49.02,59.27 49.02,65.28 v47.24,67.06 | DIGITAL_0-7.6 77.98,5.84 79.5,7.37 79.5,11.43 v80.52,12.45
WHEELROTATION
  Top 0.254: R19.2 101.01,61.79 X4.P$1 94.61,60.39 C4.1
  Bottom 0.254: ADCH.8 57.66,55.88 83.31,55.88 89.23,61.79 X4.P$1

## Text on the board
tNames: L/H/G | A15 | A14 | A13 | A12 | A11 | A10 | A9 | A7 | A6 | A5 | A4 | A3 | A2 | A1 | A0 | VIN | GND | GND | 5V | 3V3 | RES | A8 | GND | 53 | 52 | GND | RST | 51 | MOSI | SCK | 50 | 49 | 48 | 5V | MISO | 47 | 46 | 45 | 44 | 43 | 42 | 41 | 40 | 39 | 38 | 37 | 36 | 35 | 34 | 33 | 32 | 31 | 30 | 29 | 28 | 27 | 26 | 25 | 24 | 23 | 22 | 21 | 20 | 19 | 18 | 17 | 16 | 15 | 14 | 0 | 1 | 2 | 3 | 4 | 5 | 6 | 7 | 8 | 9 | 10 | 11 | 12 | 13 | GND | AREF | 5V
tSilk: Low Level v3.0